# Altium PCB PCB1.PcbDoc
Units mil, origin at the board's own origin, x right, y up, seen from the top; angles counter-clockwise.
Board outline 6000 x 4000 mil, 2 copper layers (Top Layer, Bottom Layer); 5 components, 21 nets, 83 pads, 0 vias.
Unrouted connection lines stored in the file: 21.
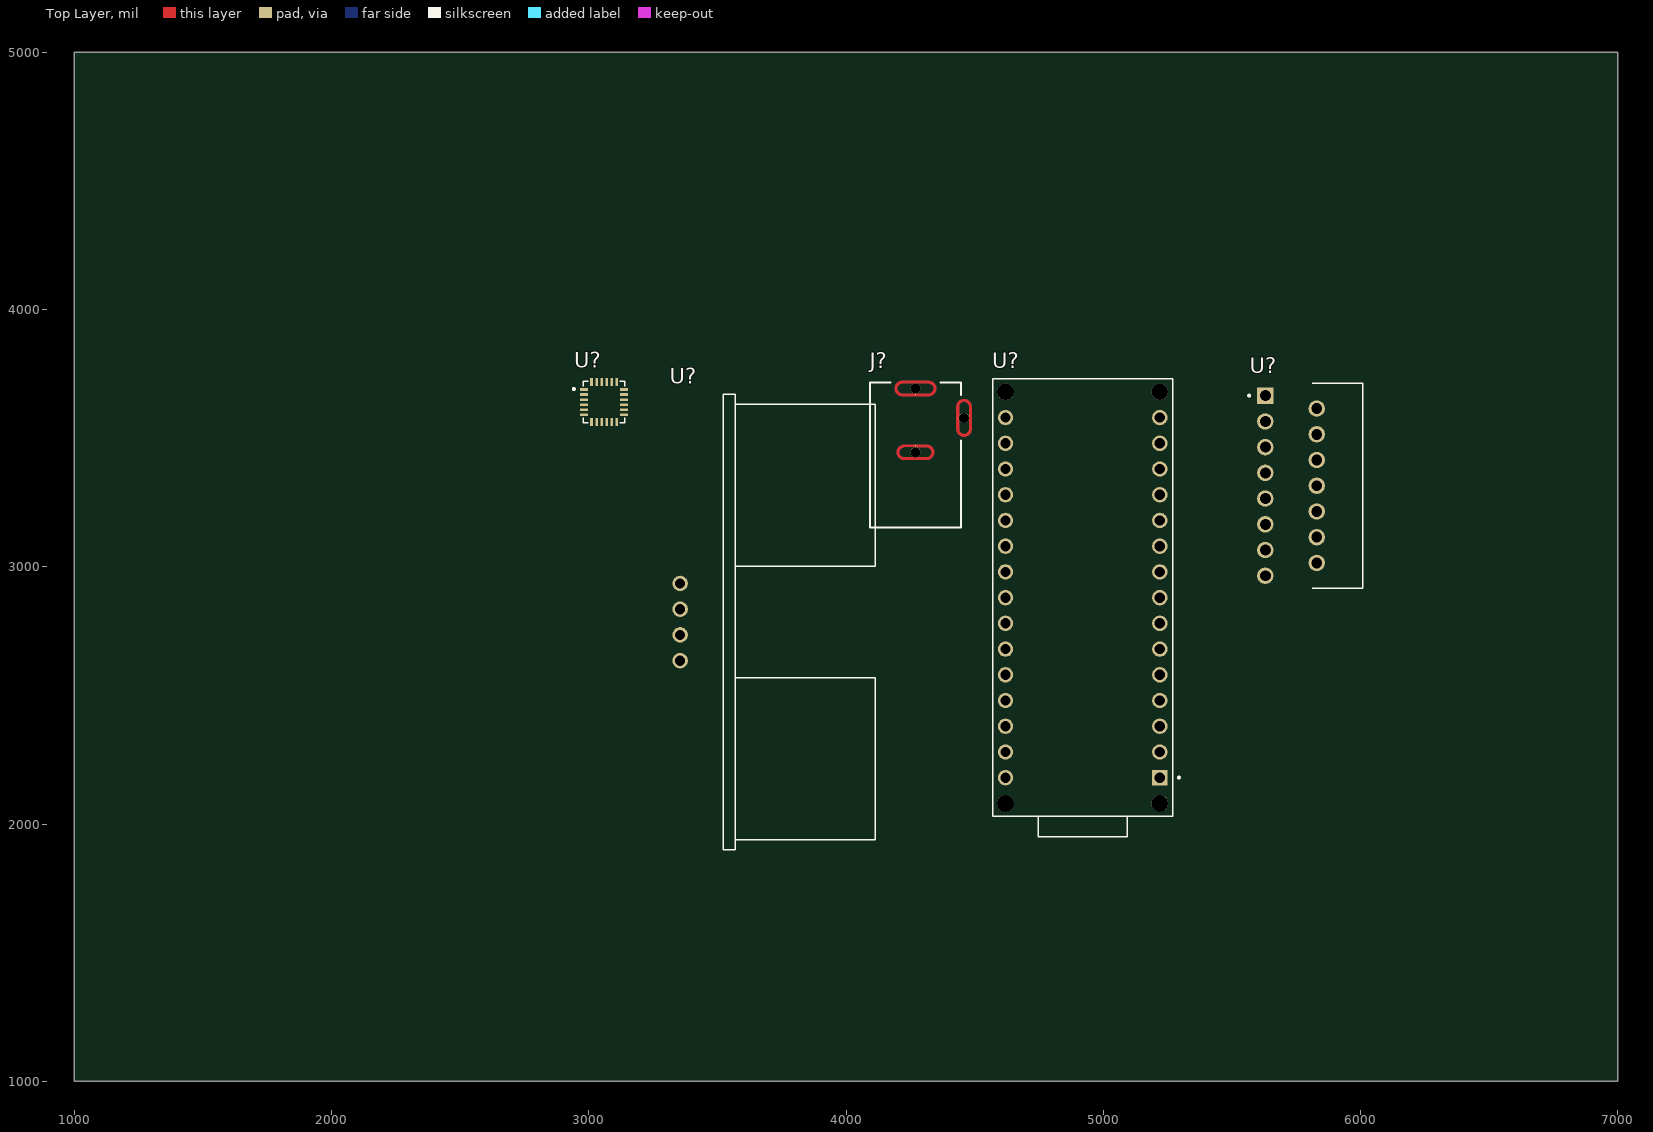
[diagram p0: Top Layer view]
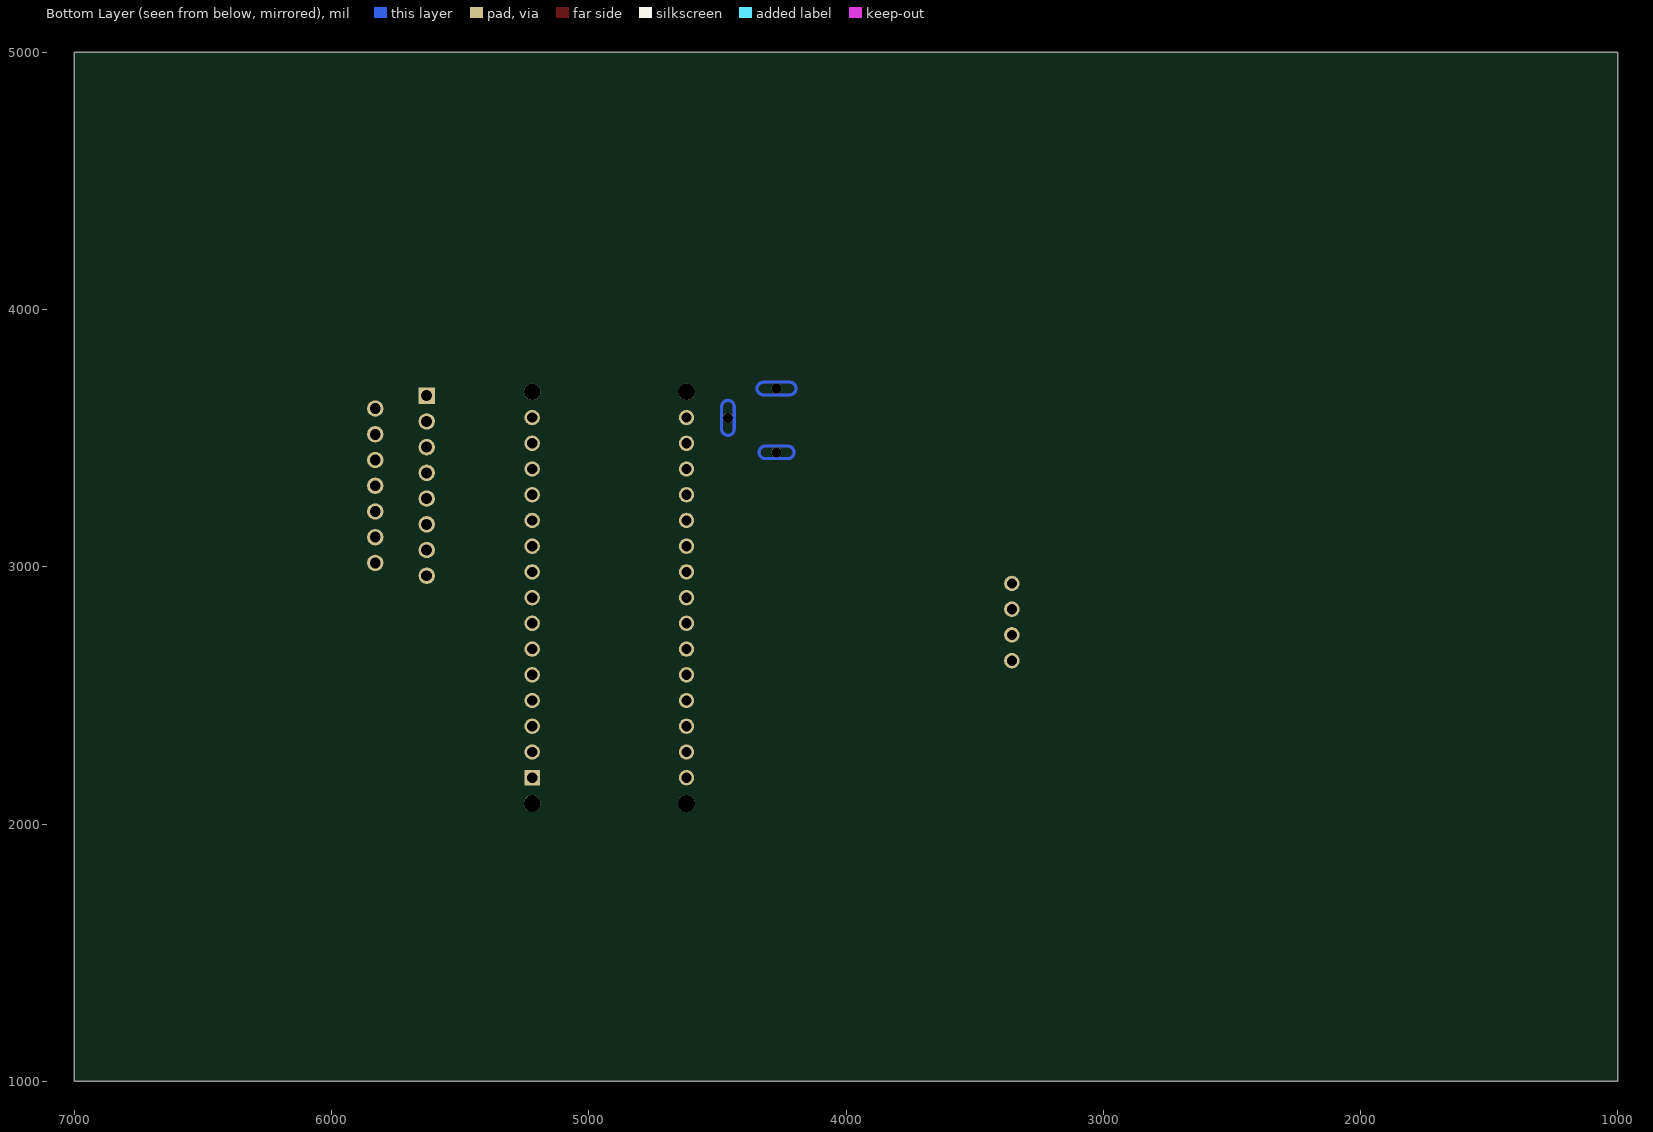
[diagram p1: Bottom Layer view, seen from below]

## Layer stack, top to bottom
Top Solder: solder mask 0.4, Solder Resist, Dk 3.5
Top Layer: signal copper 1.4
Dielectric 1: dielectric 12.6, FR-4, Dk 4.8
Bottom Layer: signal copper 1.4
Bottom Solder: solder mask 0.4, Solder Resist, Dk 3.5

## Board outline
1000,1000 7000,1000 7000,5000 1000,5000

## Design rules (kind name [scope] priority, off if disabled: settings)
Clearance [All] p1: gap=10 ignorepadtopadclearanceinfootprint=FALSE except(0: Arc-Hole Track-Hole SMDPad-Hole THPad-Hole Via-Hole Fill-Hole Poly-Hole Region-Hole Text-Hole)
PolygonConnect [All] p1: connectstyle=Relief reliefconductorwidth=10 reliefentries=4 polygonreliefangle="90 Angle" airgapwidth=10
RoutingVias [All] p1: holewidth=28 width=50 viastyle="Through Hole" minholewidth=28 minwidth=50 maxholewidth=28 maxwidth=50
SolderMaskExpansion [All] p1: expansion=4 istentingtop=FALSE
Width [All] p1: maxlimit=10 minlimit=10 preferedwidth=10
30 further rules are at their usual default settings.

## Classes and differential pairs
component class Sheet1: J? U?

## Components (designator, comment, footprint, x,y, rotation, side; value= is the part's Value field where it differs from the comment)
J? "DCJ200-10-A-XX-X_REVA" GCT_DCJ200-10-A-XX-X_REVA 4270,3435 r0 top
U? "HC-SR04" XCVR_HC-SR04 3355,2785 r90 top
U? "ABX00053" MODULE_ABX00053 4920,2880 r90 top
U? "MPU-6050" QFN50P400X400X95-24N 3060,3640 r0 top
U? "L298N" TO127P2020X500X2100-15 5630,3665 r0 top

## Footprints (in the part's own frame and the unit in brackets; to place one, negate y for a bottom-side part, rotate by r counter-clockwise, add the part's x,y. Pads: shape width x height; smd on the part's side, far side on the other; paste and mask are expansions set on the pad)
GCT_DCJ200-10-A-XX-X_REVA [mm]
  rect 0.1x0.1 smd paste-1 mask+0: 1(0,5.95) 2(0,0.9) 3(4.2,3.65)
  round 1 hole 1 unplated: ""(0,0.25) ""(0,6.55) ""(4.8,3.65)
  Top Layer region: 0,0.75 -1.1,0.75 -1.126,0.749 -1.152,0.747 -1.178,0.744 -1.204,0.739 -1.229,0.733 -1.255,0.726 -1.279,0.717 -1.303,0.707 -1.327,0.696 -1.35,0.683 -1.372,0.669 -1.394,0.655 -1.415,0.639 -1.435,0.622 -1.454,0.604 -1.472,0.585 -1.489,0.565 -1.505,0.544 -1.519,0.522 -1.533,0.5 -1.546,0.477 -1.557,0.453 -1.567,0.429 -1.576,0.405 -1.583,0.379 -1.589,0.354 -1.594,0.328 -1.597,0.302 -1.599,0.276 -1.6,0.25 -1.599,0.224 -1.597,0.198 -1.594,0.172 -1.589,0.146 -1.583,0.121 -1.576,0.095 -1.567,0.071 -1.557,0.047 -1.546,0.023 -1.533,0 -1.519,-0.022 -1.505,-0.044 -1.489,-0.065 -1.472,-0.085 -1.454,-0.104 -1.435,-0.122 -1.415,-0.139 -1.394,-0.155 -1.372,-0.169 -1.35,-0.183 -1.327,-0.196 -1.303,-0.207 -1.279,-0.217 -1.255,-0.226 -1.229,-0.233 -1.204,-0.239 -1.178,-0.244 -1.152,-0.247 -1.126,-0.249 -1.1,-0.25 0,-0.25 0,-0.5 -1.1,-0.5 -1.139,-0.499 -1.178,-0.496 -1.217,-0.491 -1.256,-0.484 -1.294,-0.474 -1.332,-0.463 -1.369,-0.45 -1.405,-0.435 -1.44,-0.418 -1.475,-0.4 -1.508,-0.379 -1.541,-0.357 -1.572,-0.333 -1.602,-0.307 -1.63,-0.28 -1.657,-0.252 -1.683,-0.222 -1.707,-0.191 -1.729,-0.158 -1.75,-0.125 -1.768,-0.09 -1.785,-0.055 -1.8,-0.019 -1.813,0.018 -1.824,0.056 -1.834,0.094 -1.841,0.133 -1.846,0.172 -1.849,0.211 -1.85,0.25 -1.849,0.289 -1.846,0.328 -1.841,0.367 -1.834,0.406 -1.824,0.444 -1.813,0.482 -1.8,0.519 -1.785,0.555 -1.768,0.59 -1.75,0.625 -1.729,0.658 -1.707,0.691 -1.683,0.722 -1.657,0.752 -1.63,0.78 -1.602,0.807 -1.572,0.833 -1.541,0.857 -1.508,0.879 -1.475,0.9 -1.44,0.918 -1.405,0.935 -1.369,0.95 -1.332,0.963 -1.294,0.974 -1.256,0.984 -1.217,0.991 -1.178,0.996 -1.139,0.999 -1.1,1 0,1
  Top Layer region: 1.139,0.999 1.178,0.996 1.217,0.991 1.256,0.984 1.294,0.974 1.332,0.963 1.369,0.95 1.405,0.935 1.44,0.918 1.475,0.9 1.508,0.879 1.541,0.857 1.572,0.833 1.602,0.807 1.63,0.78 1.657,0.752 1.683,0.722 1.707,0.691 1.729,0.658 1.75,0.625 1.768,0.59 1.785,0.555 1.8,0.519 1.813,0.482 1.824,0.444 1.834,0.406 1.841,0.367 1.846,0.328 1.849,0.289 1.85,0.25 1.849,0.211 1.846,0.172 1.841,0.133 1.834,0.094 1.824,0.056 1.813,0.018 1.8,-0.019 1.785,-0.055 1.768,-0.09 1.75,-0.125 1.729,-0.158 1.707,-0.191 1.683,-0.222 1.657,-0.252 1.63,-0.28 1.602,-0.307 1.572,-0.333 1.541,-0.357 1.508,-0.379 1.475,-0.4 1.44,-0.418 1.405,-0.435 1.369,-0.45 1.332,-0.463 1.294,-0.474 1.256,-0.484 1.217,-0.491 1.178,-0.496 1.139,-0.499 1.1,-0.5 0,-0.5 0,-0.25 1.1,-0.25 1.126,-0.249 1.152,-0.247 1.178,-0.244 1.204,-0.239 1.229,-0.233 1.255,-0.226 1.279,-0.217 1.303,-0.207 1.327,-0.196 1.35,-0.183 1.372,-0.169 1.394,-0.155 1.415,-0.139 1.435,-0.122 1.454,-0.104 1.472,-0.085 1.489,-0.065 1.505,-0.044 1.519,-0.022 1.533,0 1.546,0.023 1.557,0.047 1.567,0.071 1.576,0.095 1.583,0.121 1.589,0.146 1.594,0.172 1.597,0.198 1.599,0.224 1.6,0.25 1.599,0.276 1.597,0.302 1.594,0.328 1.589,0.354 1.583,0.379 1.576,0.405 1.567,0.429 1.557,0.453 1.546,0.477 1.533,0.5 1.519,0.522 1.505,0.544 1.489,0.565 1.472,0.585 1.454,0.604 1.435,0.622 1.415,0.639 1.394,0.655 1.372,0.669 1.35,0.683 1.327,0.696 1.303,0.707 1.279,0.717 1.255,0.726 1.229,0.733 1.204,0.739 1.178,0.744 1.152,0.747 1.126,0.749 1.1,0.75 0,0.75 0,1 1.1,1
  Top Layer region: 5.55,2.55 5.549,2.511 5.546,2.472 5.541,2.433 5.534,2.394 5.524,2.356 5.513,2.318 5.5,2.281 5.485,2.245 5.468,2.21 5.45,2.175 5.429,2.142 5.407,2.109 5.383,2.078 5.357,2.048 5.33,2.02 5.302,1.993 5.272,1.967 5.241,1.943 5.208,1.921 5.175,1.9 5.14,1.882 5.105,1.865 5.069,1.85 5.032,1.837 4.994,1.826 4.956,1.816 4.917,1.809 4.878,1.804 4.839,1.801 4.8,1.8 4.761,1.801 4.722,1.804 4.683,1.809 4.644,1.816 4.606,1.826 4.568,1.837 4.531,1.85 4.495,1.865 4.46,1.882 4.425,1.9 4.392,1.921 4.359,1.943 4.328,1.967 4.298,1.993 4.27,2.02 4.243,2.048 4.217,2.078 4.193,2.109 4.171,2.142 4.15,2.175 4.132,2.21 4.115,2.245 4.1,2.281 4.087,2.318 4.076,2.356 4.066,2.394 4.059,2.433 4.054,2.472 4.051,2.511 4.05,2.55 4.05,3.65 4.3,3.65 4.3,2.55 4.301,2.524 4.303,2.498 4.306,2.472 4.311,2.446 4.317,2.421 4.324,2.395 4.333,2.371 4.343,2.347 4.354,2.323 4.367,2.3 4.381,2.278 4.395,2.256 4.411,2.235 4.428,2.215 4.446,2.196 4.465,2.178 4.485,2.161 4.506,2.145 4.528,2.131 4.55,2.117 4.573,2.104 4.597,2.093 4.621,2.083 4.645,2.074 4.671,2.067 4.696,2.061 4.722,2.056 4.748,2.053 4.774,2.051 4.8,2.05 4.826,2.051 4.852,2.053 4.878,2.056 4.904,2.061 4.929,2.067 4.955,2.074 4.979,2.083 5.003,2.093 5.027,2.104 5.05,2.117 5.072,2.131 5.094,2.145 5.115,2.161 5.135,2.178 5.154,2.196 5.172,2.215 5.189,2.235 5.205,2.256 5.219,2.278 5.233,2.3 5.246,2.323 5.257,2.347 5.267,2.371 5.276,2.395 5.283,2.421 5.289,2.446 5.294,2.472 5.297,2.498 5.299,2.524 5.3,2.55 5.3,3.65 5.55,3.65
  Top Layer region: 4.839,5.499 4.878,5.496 4.917,5.491 4.956,5.484 4.994,5.474 5.032,5.463 5.069,5.45 5.105,5.435 5.14,5.418 5.175,5.4 5.208,5.379 5.241,5.357 5.272,5.333 5.302,5.307 5.33,5.28 5.357,5.252 5.383,5.222 5.407,5.191 5.429,5.158 5.45,5.125 5.468,5.09 5.485,5.055 5.5,5.019 5.513,4.982 5.524,4.944 5.534,4.906 5.541,4.867 5.546,4.828 5.549,4.789 5.55,4.75 5.55,3.65 5.3,3.65 5.3,4.75 5.299,4.776 5.297,4.802 5.294,4.828 5.289,4.854 5.283,4.879 5.276,4.905 5.267,4.929 5.257,4.953 5.246,4.977 5.233,5 5.219,5.022 5.205,5.044 5.189,5.065 5.172,5.085 5.154,5.104 5.135,5.122 5.115,5.139 5.094,5.155 5.072,5.169 5.05,5.183 5.027,5.196 5.003,5.207 4.979,5.217 4.955,5.226 4.929,5.233 4.904,5.239 4.878,5.244 4.852,5.247 4.826,5.249 4.8,5.25 4.774,5.249 4.748,5.247 4.722,5.244 4.696,5.239 4.671,5.233 4.645,5.226 4.621,5.217 4.597,5.207 4.573,5.196 4.55,5.183 4.528,5.169 4.506,5.155 4.485,5.139 4.465,5.122 4.446,5.104 4.428,5.085 4.411,5.065 4.395,5.044 4.381,5.022 4.367,5 4.354,4.977 4.343,4.953 4.333,4.929 4.324,4.905 4.317,4.879 4.311,4.854 4.306,4.828 4.303,4.802 4.301,4.776 4.3,4.75 4.3,3.65 4.05,3.65 4.05,4.75 4.051,4.789 4.054,4.828 4.059,4.867 4.066,4.906 4.076,4.944 4.087,4.982 4.1,5.019 4.115,5.055 4.132,5.09 4.15,5.125 4.171,5.158 4.193,5.191 4.217,5.222 4.243,5.252 4.27,5.28 4.298,5.307 4.328,5.333 4.359,5.357 4.392,5.379 4.425,5.4 4.46,5.418 4.495,5.435 4.531,5.45 4.568,5.463 4.606,5.474 4.644,5.484 4.683,5.491 4.722,5.496 4.761,5.499 4.8,5.5
  Top Layer region: 0,7.05 -1.3,7.05 -1.326,7.049 -1.352,7.047 -1.378,7.044 -1.404,7.039 -1.429,7.033 -1.455,7.026 -1.479,7.017 -1.503,7.007 -1.527,6.996 -1.55,6.983 -1.572,6.969 -1.594,6.955 -1.615,6.939 -1.635,6.922 -1.654,6.904 -1.672,6.885 -1.689,6.865 -1.705,6.844 -1.719,6.822 -1.733,6.8 -1.746,6.777 -1.757,6.753 -1.767,6.729 -1.776,6.705 -1.783,6.679 -1.789,6.654 -1.794,6.628 -1.797,6.602 -1.799,6.576 -1.8,6.55 -1.799,6.524 -1.797,6.498 -1.794,6.472 -1.789,6.446 -1.783,6.421 -1.776,6.395 -1.767,6.371 -1.757,6.347 -1.746,6.323 -1.733,6.3 -1.719,6.278 -1.705,6.256 -1.689,6.235 -1.672,6.215 -1.654,6.196 -1.635,6.178 -1.615,6.161 -1.594,6.145 -1.572,6.131 -1.55,6.117 -1.527,6.104 -1.503,6.093 -1.479,6.083 -1.455,6.074 -1.429,6.067 -1.404,6.061 -1.378,6.056 -1.352,6.053 -1.326,6.051 -1.3,6.05 0,6.05 0,5.8 -1.3,5.8 -1.339,5.801 -1.378,5.804 -1.417,5.809 -1.456,5.816 -1.494,5.826 -1.532,5.837 -1.569,5.85 -1.605,5.865 -1.64,5.882 -1.675,5.9 -1.708,5.921 -1.741,5.943 -1.772,5.967 -1.802,5.993 -1.83,6.02 -1.857,6.048 -1.883,6.078 -1.907,6.109 -1.929,6.142 -1.95,6.175 -1.968,6.21 -1.985,6.245 -2,6.281 -2.013,6.318 -2.024,6.356 -2.034,6.394 -2.041,6.433 -2.046,6.472 -2.049,6.511 -2.05,6.55 -2.049,6.589 -2.046,6.628 -2.041,6.667 -2.034,6.706 -2.024,6.744 -2.013,6.782 -2,6.819 -1.985,6.855 -1.968,6.89 -1.95,6.925 -1.929,6.958 -1.907,6.991 -1.883,7.022 -1.857,7.052 -1.83,7.08 -1.802,7.107 -1.772,7.133 -1.741,7.157 -1.708,7.179 -1.675,7.2 -1.64,7.218 -1.605,7.235 -1.569,7.25 -1.532,7.263 -1.494,7.274 -1.456,7.284 -1.417,7.291 -1.378,7.296 -1.339,7.299 -1.3,7.3 0,7.3
  Top Layer region: 1.339,7.299 1.378,7.296 1.417,7.291 1.456,7.284 1.494,7.274 1.532,7.263 1.569,7.25 1.605,7.235 1.64,7.218 1.675,7.2 1.708,7.179 1.741,7.157 1.772,7.133 1.802,7.107 1.83,7.08 1.857,7.052 1.883,7.022 1.907,6.991 1.929,6.958 1.95,6.925 1.968,6.89 1.985,6.855 2,6.819 2.013,6.782 2.024,6.744 2.034,6.706 2.041,6.667 2.046,6.628 2.049,6.589 2.05,6.55 2.049,6.511 2.046,6.472 2.041,6.433 2.034,6.394 2.024,6.356 2.013,6.318 2,6.281 1.985,6.245 1.968,6.21 1.95,6.175 1.929,6.142 1.907,6.109 1.883,6.078 1.857,6.048 1.83,6.02 1.802,5.993 1.772,5.967 1.741,5.943 1.708,5.921 1.675,5.9 1.64,5.882 1.605,5.865 1.569,5.85 1.532,5.837 1.494,5.826 1.456,5.816 1.417,5.809 1.378,5.804 1.339,5.801 1.3,5.8 0,5.8 0,6.05 1.3,6.05 1.326,6.051 1.352,6.053 1.378,6.056 1.404,6.061 1.429,6.067 1.455,6.074 1.479,6.083 1.503,6.093 1.527,6.104 1.55,6.117 1.572,6.131 1.594,6.145 1.615,6.161 1.635,6.178 1.654,6.196 1.672,6.215 1.689,6.235 1.705,6.256 1.719,6.278 1.733,6.3 1.746,6.323 1.757,6.347 1.767,6.371 1.776,6.395 1.783,6.421 1.789,6.446 1.794,6.472 1.797,6.498 1.799,6.524 1.8,6.55 1.799,6.576 1.797,6.602 1.794,6.628 1.789,6.654 1.783,6.679 1.776,6.705 1.767,6.729 1.757,6.753 1.746,6.777 1.733,6.8 1.719,6.822 1.705,6.844 1.689,6.865 1.672,6.885 1.654,6.904 1.635,6.922 1.615,6.939 1.594,6.955 1.572,6.969 1.55,6.983 1.527,6.996 1.503,7.007 1.479,7.017 1.455,7.026 1.429,7.033 1.404,7.039 1.378,7.044 1.352,7.047 1.326,7.049 1.3,7.05 0,7.05 0,7.3 1.3,7.3
  Bottom Layer region: 0,0.75 -1.1,0.75 -1.126,0.749 -1.152,0.747 -1.178,0.744 -1.204,0.739 -1.229,0.733 -1.255,0.726 -1.279,0.717 -1.303,0.707 -1.327,0.696 -1.35,0.683 -1.372,0.669 -1.394,0.655 -1.415,0.639 -1.435,0.622 -1.454,0.604 -1.472,0.585 -1.489,0.565 -1.505,0.544 -1.519,0.522 -1.533,0.5 -1.546,0.477 -1.557,0.453 -1.567,0.429 -1.576,0.405 -1.583,0.379 -1.589,0.354 -1.594,0.328 -1.597,0.302 -1.599,0.276 -1.6,0.25 -1.599,0.224 -1.597,0.198 -1.594,0.172 -1.589,0.146 -1.583,0.121 -1.576,0.095 -1.567,0.071 -1.557,0.047 -1.546,0.023 -1.533,0 -1.519,-0.022 -1.505,-0.044 -1.489,-0.065 -1.472,-0.085 -1.454,-0.104 -1.435,-0.122 -1.415,-0.139 -1.394,-0.155 -1.372,-0.169 -1.35,-0.183 -1.327,-0.196 -1.303,-0.207 -1.279,-0.217 -1.255,-0.226 -1.229,-0.233 -1.204,-0.239 -1.178,-0.244 -1.152,-0.247 -1.126,-0.249 -1.1,-0.25 0,-0.25 0,-0.5 -1.1,-0.5 -1.139,-0.499 -1.178,-0.496 -1.217,-0.491 -1.256,-0.484 -1.294,-0.474 -1.332,-0.463 -1.369,-0.45 -1.405,-0.435 -1.44,-0.418 -1.475,-0.4 -1.508,-0.379 -1.541,-0.357 -1.572,-0.333 -1.602,-0.307 -1.63,-0.28 -1.657,-0.252 -1.683,-0.222 -1.707,-0.191 -1.729,-0.158 -1.75,-0.125 -1.768,-0.09 -1.785,-0.055 -1.8,-0.019 -1.813,0.018 -1.824,0.056 -1.834,0.094 -1.841,0.133 -1.846,0.172 -1.849,0.211 -1.85,0.25 -1.849,0.289 -1.846,0.328 -1.841,0.367 -1.834,0.406 -1.824,0.444 -1.813,0.482 -1.8,0.519 -1.785,0.555 -1.768,0.59 -1.75,0.625 -1.729,0.658 -1.707,0.691 -1.683,0.722 -1.657,0.752 -1.63,0.78 -1.602,0.807 -1.572,0.833 -1.541,0.857 -1.508,0.879 -1.475,0.9 -1.44,0.918 -1.405,0.935 -1.369,0.95 -1.332,0.963 -1.294,0.974 -1.256,0.984 -1.217,0.991 -1.178,0.996 -1.139,0.999 -1.1,1 0,1
  Bottom Layer region: 1.139,0.999 1.178,0.996 1.217,0.991 1.256,0.984 1.294,0.974 1.332,0.963 1.369,0.95 1.405,0.935 1.44,0.918 1.475,0.9 1.508,0.879 1.541,0.857 1.572,0.833 1.602,0.807 1.63,0.78 1.657,0.752 1.683,0.722 1.707,0.691 1.729,0.658 1.75,0.625 1.768,0.59 1.785,0.555 1.8,0.519 1.813,0.482 1.824,0.444 1.834,0.406 1.841,0.367 1.846,0.328 1.849,0.289 1.85,0.25 1.849,0.211 1.846,0.172 1.841,0.133 1.834,0.094 1.824,0.056 1.813,0.018 1.8,-0.019 1.785,-0.055 1.768,-0.09 1.75,-0.125 1.729,-0.158 1.707,-0.191 1.683,-0.222 1.657,-0.252 1.63,-0.28 1.602,-0.307 1.572,-0.333 1.541,-0.357 1.508,-0.379 1.475,-0.4 1.44,-0.418 1.405,-0.435 1.369,-0.45 1.332,-0.463 1.294,-0.474 1.256,-0.484 1.217,-0.491 1.178,-0.496 1.139,-0.499 1.1,-0.5 0,-0.5 0,-0.25 1.1,-0.25 1.126,-0.249 1.152,-0.247 1.178,-0.244 1.204,-0.239 1.229,-0.233 1.255,-0.226 1.279,-0.217 1.303,-0.207 1.327,-0.196 1.35,-0.183 1.372,-0.169 1.394,-0.155 1.415,-0.139 1.435,-0.122 1.454,-0.104 1.472,-0.085 1.489,-0.065 1.505,-0.044 1.519,-0.022 1.533,0 1.546,0.023 1.557,0.047 1.567,0.071 1.576,0.095 1.583,0.121 1.589,0.146 1.594,0.172 1.597,0.198 1.599,0.224 1.6,0.25 1.599,0.276 1.597,0.302 1.594,0.328 1.589,0.354 1.583,0.379 1.576,0.405 1.567,0.429 1.557,0.453 1.546,0.477 1.533,0.5 1.519,0.522 1.505,0.544 1.489,0.565 1.472,0.585 1.454,0.604 1.435,0.622 1.415,0.639 1.394,0.655 1.372,0.669 1.35,0.683 1.327,0.696 1.303,0.707 1.279,0.717 1.255,0.726 1.229,0.733 1.204,0.739 1.178,0.744 1.152,0.747 1.126,0.749 1.1,0.75 0,0.75 0,1 1.1,1
  Bottom Layer region: 5.55,2.55 5.549,2.511 5.546,2.472 5.541,2.433 5.534,2.394 5.524,2.356 5.513,2.318 5.5,2.281 5.485,2.245 5.468,2.21 5.45,2.175 5.429,2.142 5.407,2.109 5.383,2.078 5.357,2.048 5.33,2.02 5.302,1.993 5.272,1.967 5.241,1.943 5.208,1.921 5.175,1.9 5.14,1.882 5.105,1.865 5.069,1.85 5.032,1.837 4.994,1.826 4.956,1.816 4.917,1.809 4.878,1.804 4.839,1.801 4.8,1.8 4.761,1.801 4.722,1.804 4.683,1.809 4.644,1.816 4.606,1.826 4.568,1.837 4.531,1.85 4.495,1.865 4.46,1.882 4.425,1.9 4.392,1.921 4.359,1.943 4.328,1.967 4.298,1.993 4.27,2.02 4.243,2.048 4.217,2.078 4.193,2.109 4.171,2.142 4.15,2.175 4.132,2.21 4.115,2.245 4.1,2.281 4.087,2.318 4.076,2.356 4.066,2.394 4.059,2.433 4.054,2.472 4.051,2.511 4.05,2.55 4.05,3.65 4.3,3.65 4.3,2.55 4.301,2.524 4.303,2.498 4.306,2.472 4.311,2.446 4.317,2.421 4.324,2.395 4.333,2.371 4.343,2.347 4.354,2.323 4.367,2.3 4.381,2.278 4.395,2.256 4.411,2.235 4.428,2.215 4.446,2.196 4.465,2.178 4.485,2.161 4.506,2.145 4.528,2.131 4.55,2.117 4.573,2.104 4.597,2.093 4.621,2.083 4.645,2.074 4.671,2.067 4.696,2.061 4.722,2.056 4.748,2.053 4.774,2.051 4.8,2.05 4.826,2.051 4.852,2.053 4.878,2.056 4.904,2.061 4.929,2.067 4.955,2.074 4.979,2.083 5.003,2.093 5.027,2.104 5.05,2.117 5.072,2.131 5.094,2.145 5.115,2.161 5.135,2.178 5.154,2.196 5.172,2.215 5.189,2.235 5.205,2.256 5.219,2.278 5.233,2.3 5.246,2.323 5.257,2.347 5.267,2.371 5.276,2.395 5.283,2.421 5.289,2.446 5.294,2.472 5.297,2.498 5.299,2.524 5.3,2.55 5.3,3.65 5.55,3.65
  Bottom Layer region: 4.839,5.499 4.878,5.496 4.917,5.491 4.956,5.484 4.994,5.474 5.032,5.463 5.069,5.45 5.105,5.435 5.14,5.418 5.175,5.4 5.208,5.379 5.241,5.357 5.272,5.333 5.302,5.307 5.33,5.28 5.357,5.252 5.383,5.222 5.407,5.191 5.429,5.158 5.45,5.125 5.468,5.09 5.485,5.055 5.5,5.019 5.513,4.982 5.524,4.944 5.534,4.906 5.541,4.867 5.546,4.828 5.549,4.789 5.55,4.75 5.55,3.65 5.3,3.65 5.3,4.75 5.299,4.776 5.297,4.802 5.294,4.828 5.289,4.854 5.283,4.879 5.276,4.905 5.267,4.929 5.257,4.953 5.246,4.977 5.233,5 5.219,5.022 5.205,5.044 5.189,5.065 5.172,5.085 5.154,5.104 5.135,5.122 5.115,5.139 5.094,5.155 5.072,5.169 5.05,5.183 5.027,5.196 5.003,5.207 4.979,5.217 4.955,5.226 4.929,5.233 4.904,5.239 4.878,5.244 4.852,5.247 4.826,5.249 4.8,5.25 4.774,5.249 4.748,5.247 4.722,5.244 4.696,5.239 4.671,5.233 4.645,5.226 4.621,5.217 4.597,5.207 4.573,5.196 4.55,5.183 4.528,5.169 4.506,5.155 4.485,5.139 4.465,5.122 4.446,5.104 4.428,5.085 4.411,5.065 4.395,5.044 4.381,5.022 4.367,5 4.354,4.977 4.343,4.953 4.333,4.929 4.324,4.905 4.317,4.879 4.311,4.854 4.306,4.828 4.303,4.802 4.301,4.776 4.3,4.75 4.3,3.65 4.05,3.65 4.05,4.75 4.051,4.789 4.054,4.828 4.059,4.867 4.066,4.906 4.076,4.944 4.087,4.982 4.1,5.019 4.115,5.055 4.132,5.09 4.15,5.125 4.171,5.158 4.193,5.191 4.217,5.222 4.243,5.252 4.27,5.28 4.298,5.307 4.328,5.333 4.359,5.357 4.392,5.379 4.425,5.4 4.46,5.418 4.495,5.435 4.531,5.45 4.568,5.463 4.606,5.474 4.644,5.484 4.683,5.491 4.722,5.496 4.761,5.499 4.8,5.5
  Bottom Layer region: 0,7.05 -1.3,7.05 -1.326,7.049 -1.352,7.047 -1.378,7.044 -1.404,7.039 -1.429,7.033 -1.455,7.026 -1.479,7.017 -1.503,7.007 -1.527,6.996 -1.55,6.983 -1.572,6.969 -1.594,6.955 -1.615,6.939 -1.635,6.922 -1.654,6.904 -1.672,6.885 -1.689,6.865 -1.705,6.844 -1.719,6.822 -1.733,6.8 -1.746,6.777 -1.757,6.753 -1.767,6.729 -1.776,6.705 -1.783,6.679 -1.789,6.654 -1.794,6.628 -1.797,6.602 -1.799,6.576 -1.8,6.55 -1.799,6.524 -1.797,6.498 -1.794,6.472 -1.789,6.446 -1.783,6.421 -1.776,6.395 -1.767,6.371 -1.757,6.347 -1.746,6.323 -1.733,6.3 -1.719,6.278 -1.705,6.256 -1.689,6.235 -1.672,6.215 -1.654,6.196 -1.635,6.178 -1.615,6.161 -1.594,6.145 -1.572,6.131 -1.55,6.117 -1.527,6.104 -1.503,6.093 -1.479,6.083 -1.455,6.074 -1.429,6.067 -1.404,6.061 -1.378,6.056 -1.352,6.053 -1.326,6.051 -1.3,6.05 0,6.05 0,5.8 -1.3,5.8 -1.339,5.801 -1.378,5.804 -1.417,5.809 -1.456,5.816 -1.494,5.826 -1.532,5.837 -1.569,5.85 -1.605,5.865 -1.64,5.882 -1.675,5.9 -1.708,5.921 -1.741,5.943 -1.772,5.967 -1.802,5.993 -1.83,6.02 -1.857,6.048 -1.883,6.078 -1.907,6.109 -1.929,6.142 -1.95,6.175 -1.968,6.21 -1.985,6.245 -2,6.281 -2.013,6.318 -2.024,6.356 -2.034,6.394 -2.041,6.433 -2.046,6.472 -2.049,6.511 -2.05,6.55 -2.049,6.589 -2.046,6.628 -2.041,6.667 -2.034,6.706 -2.024,6.744 -2.013,6.782 -2,6.819 -1.985,6.855 -1.968,6.89 -1.95,6.925 -1.929,6.958 -1.907,6.991 -1.883,7.022 -1.857,7.052 -1.83,7.08 -1.802,7.107 -1.772,7.133 -1.741,7.157 -1.708,7.179 -1.675,7.2 -1.64,7.218 -1.605,7.235 -1.569,7.25 -1.532,7.263 -1.494,7.274 -1.456,7.284 -1.417,7.291 -1.378,7.296 -1.339,7.299 -1.3,7.3 0,7.3
  Bottom Layer region: 1.339,7.299 1.378,7.296 1.417,7.291 1.456,7.284 1.494,7.274 1.532,7.263 1.569,7.25 1.605,7.235 1.64,7.218 1.675,7.2 1.708,7.179 1.741,7.157 1.772,7.133 1.802,7.107 1.83,7.08 1.857,7.052 1.883,7.022 1.907,6.991 1.929,6.958 1.95,6.925 1.968,6.89 1.985,6.855 2,6.819 2.013,6.782 2.024,6.744 2.034,6.706 2.041,6.667 2.046,6.628 2.049,6.589 2.05,6.55 2.049,6.511 2.046,6.472 2.041,6.433 2.034,6.394 2.024,6.356 2.013,6.318 2,6.281 1.985,6.245 1.968,6.21 1.95,6.175 1.929,6.142 1.907,6.109 1.883,6.078 1.857,6.048 1.83,6.02 1.802,5.993 1.772,5.967 1.741,5.943 1.708,5.921 1.675,5.9 1.64,5.882 1.605,5.865 1.569,5.85 1.532,5.837 1.494,5.826 1.456,5.816 1.417,5.809 1.378,5.804 1.339,5.801 1.3,5.8 0,5.8 0,6.05 1.3,6.05 1.326,6.051 1.352,6.053 1.378,6.056 1.404,6.061 1.429,6.067 1.455,6.074 1.479,6.083 1.503,6.093 1.527,6.104 1.55,6.117 1.572,6.131 1.594,6.145 1.615,6.161 1.635,6.178 1.654,6.196 1.672,6.215 1.689,6.235 1.705,6.256 1.719,6.278 1.733,6.3 1.746,6.323 1.757,6.347 1.767,6.371 1.776,6.395 1.783,6.421 1.789,6.446 1.794,6.472 1.797,6.498 1.799,6.524 1.8,6.55 1.799,6.576 1.797,6.602 1.794,6.628 1.789,6.654 1.783,6.679 1.776,6.705 1.767,6.729 1.757,6.753 1.746,6.777 1.733,6.8 1.719,6.822 1.705,6.844 1.689,6.865 1.672,6.885 1.654,6.904 1.635,6.922 1.615,6.939 1.594,6.955 1.572,6.969 1.55,6.983 1.527,6.996 1.503,7.007 1.479,7.017 1.455,7.026 1.429,7.033 1.404,7.039 1.378,7.044 1.352,7.047 1.326,7.049 1.3,7.05 0,7.05 0,7.3 1.3,7.3
  silkscreen extent -4.5,-7.15 4.5,7.15, body extent -4.5,-6.75 5.05,7.55, height 11
MODULE_ABX00053 [mil]
  rect 60x60 / inner round 60 / far side rect 60x60 hole 40: 1(-700,-300)
  round 60 hole 40: 2(-600,-300) 3(-500,-300) 4(-400,-300) 5(-300,-300) 6(-200,-300) 7(-100,-300) 8(0,-300) 9(100,-300) 10(200,-300) 11(300,-300) 12(400,-300) 13(500,-300) 14(600,-300) 15(700,-300) 16(700,300) 17(600,300) 18(500,300) 19(400,300) 20(300,300) 21(200,300) 22(100,300) 23(0,300) 24(-100,300) 25(-200,300) 26(-300,300) 27(-400,300) 28(-500,300) 29(-600,300) 30(-700,300)
  round 64.96 hole 64.96 unplated: ""(-800,-300) ""(-800,300) ""(800,-300) ""(800,300)
  silkscreen extent -929,-378 850,350, body extent -905,-350 850,350, height 315
QFN50P400X400X95-24N [mm]
  rect 0.79x0.26 smd: 1(-1.97,1.25) 2(-1.97,0.75) 3(-1.97,0.25) 4(-1.97,-0.25) 5(-1.97,-0.75) 6(-1.97,-1.25) 13(1.97,-1.25) 14(1.97,-0.75) 15(1.97,-0.25) 16(1.97,0.25) 17(1.97,0.75) 18(1.97,1.25)
  rect 0.26x0.79 smd: 7(-1.25,-1.97) 8(-0.75,-1.97) 9(-0.25,-1.97) 10(0.25,-1.97) 11(0.75,-1.97) 12(1.25,-1.97) 19(1.25,1.97) 20(0.75,1.97) 21(0.25,1.97) 22(-0.25,1.97) 23(-0.75,1.97) 24(-1.25,1.97)
  silkscreen extent -3.1,-2.05 2.05,2.05, body extent -2,-2 2,2, height 0.93
TO127P2020X500X2100-15 [mm]
  rect 1.62x1.62 hole 1.08: 1(0,0)
  round 1.62 hole 1.08: 2(5.08,-1.27) 3(0,-2.54) 4(5.08,-3.81) 5(0,-5.08) 6(5.08,-6.35) 7(0,-7.62) 8(5.08,-8.89) 9(0,-10.16) 10(5.08,-11.43) 11(0,-12.7) 12(5.08,-13.97) 13(0,-15.24) 14(5.08,-16.51) 15(0,-17.78)
  silkscreen extent -1.69,-18.99 9.63,1.21
XCVR_HC-SR04 [mm]
  round 1.53 hole 1.02: 1(-3.81,0) 2(-1.27,0) 3(1.27,0) 4(3.81,0)
  silkscreen extent -22.5,-19.27 22.5,-4.27

## Part data
J?: "Power Barrel Connector Jack 2.05mm ID (0.081\"), 5.50mm OD (0.217\") Through Hole, Right Angle", Package=None, Availability=Unavailable, Check_prices=https://www.snapeda.com/parts/DCJ200-10-A-K1-K/Global+Connector+Technology/view-part/?ref=eda, MF="Global Connector Technology", MP=DCJ200-10-A-K1-K, Price=None, SnapEDA_Link=https://www.snapeda.com/parts/DCJ200-10-A-K1-K/Global+Connector+Technology/view-part/?ref=snap
U?: "Ultrasonic Sensor Module", Package=None, Availability=Unavailable, MP=HC-SR04, Price=None
U?: "NINA-W102, RP2040 Arduino Nano RP2040 Connect with Headers series ARMÂ® CortexÂ®-M0+ MCU 32-Bit Embedded Evaluation Board", Package=None, Check_prices=https://www.snapeda.com/parts/ABX00053/Arduino/view-part/?ref=eda, Digi-Key_Part_Number=1050-ABX00053-ND, MF=Arduino, MP=ABX00053, Purchase-URL=https://pricing.snapeda.com/search/part/ABX00053/?ref=eda, SnapEDA_Link=https://www.snapeda.com/parts/ABX00053/Arduino/view-part/?ref=snap
U?: "MPU-6050 series Accelerometer, Gyroscope, 3 Axis Sensor Evaluation Board", Package="QFN-24 InvenSense", Availability="In Stock", Check_prices=https://www.snapeda.com/parts/MPU-6050/TDK+InvenSense/view-part/?ref=eda, MF="TDK InvenSense", MP=MPU-6050, Price=None, Purchase-URL=https://pricing.snapeda.com/search/part/MPU-6050/?ref=eda, SnapEDA_Link=https://www.snapeda.com/parts/MPU-6050/TDK+InvenSense/view-part/?ref=snap
U?: "Dual Full Bridge Motor Driver 15-Pin(15+Tab) MULTIWATT V Tube", Package=None, Availability=Unavailable, MP=L298N, Price=None

## Nets (pads, with @x,y where several pads share a name; then routed paths per layer and width w, separated by ;. In a path a pad name is that pad's centre, name@x,y a point inside that pad or via, vN(x,y) a via of type N, cw(c..) or ccw(c..) an arc to the next point about the centre after c; other vN are vias at no path point)
ECHO: U?.3@3355,2835 U?.26
ENA: U?.5@5220,2580 U?.6@5830,3415
ENB: U?.6@5220,2680 U?.11@5630,3165
GND: J?.2 J?.3 U?.1@5630,3665 U?.4@3355,2935 U?.8@5830,3315 U?.13@5220,3380 U?.15@5630,2965 U?.18
IN1: U?.5@5630,3465 U?.20@4620,3180
IN2: U?.7@5630,3365 U?.21@4620,3080
IN3: U?.10@5830,3215 U?.22@4620,2980
IN4: U?.12@5830,3115 U?.23@4620,2880
NetD?_2: 
NetJ?_1: J?.1
NetM?_2: 
NetM?_3: 
OUT1: U?.2@5830,3615
OUT2: U?.3@5630,3565
OUT3: U?.13@5630,3065
OUT4: U?.14@5830,3015
SCL: U?.9@5220,2980 U?.23@3030.47,3717.56
SDA: U?.8@5220,2880 U?.24@3010.79,3717.56
TRIG: U?.2@3355,2735 U?.25
Vs: U?.4@5830,3515 U?.13@3137.56,3590.79
VSS: U?.1@3355,2635 U?.9@5630,3265 U?.12@5220,3280
pads on no net: J?. U?. U?.1@2982.44,3689.21 U?.1@5220,2180 U?.2@2982.44,3669.53 U?.2@5220,2280 U?.3@2982.44,3649.84 U?.3@5220,2380 U?.4@2982.44,3630.16 U?.4@5220,2480 U?.5@2982.44,3610.47 U?.6@2982.44,3590.79 U?.7@3010.79,3562.44 U?.7@5220,2780 U?.8@3030.47,3562.44 U?.9@3050.16,3562.44 U?.10@3069.84,3562.44 U?.10@5220,3080 U?.11@3089.53,3562.44 U?.11@5220,3180 U?.12@3109.21,3562.44 U?.14@3137.56,3610.47 U?.14@5220,3480 U?.15@3137.56,3630.16 U?.15@5220,3580 U?.16 U?.17 U?.19 U?.20@3089.53,3717.56 U?.21@3069.84,3717.56 U?.22@3050.16,3717.56 U?.24@4620,2780 U?.27 U?.28 U?.29 U?.30